# Altium PCB PCB_monitoring_ConnectA10.PcbDoc
Units mm, origin at the board's own origin, x right, y up, seen from the top; angles counter-clockwise.
Board outline 35 x 60 mm, 2 copper layers (Top Layer, Bottom Layer), stack 1.571 mm thick; 9 components, 232 nets, 190 pads, 3 vias.
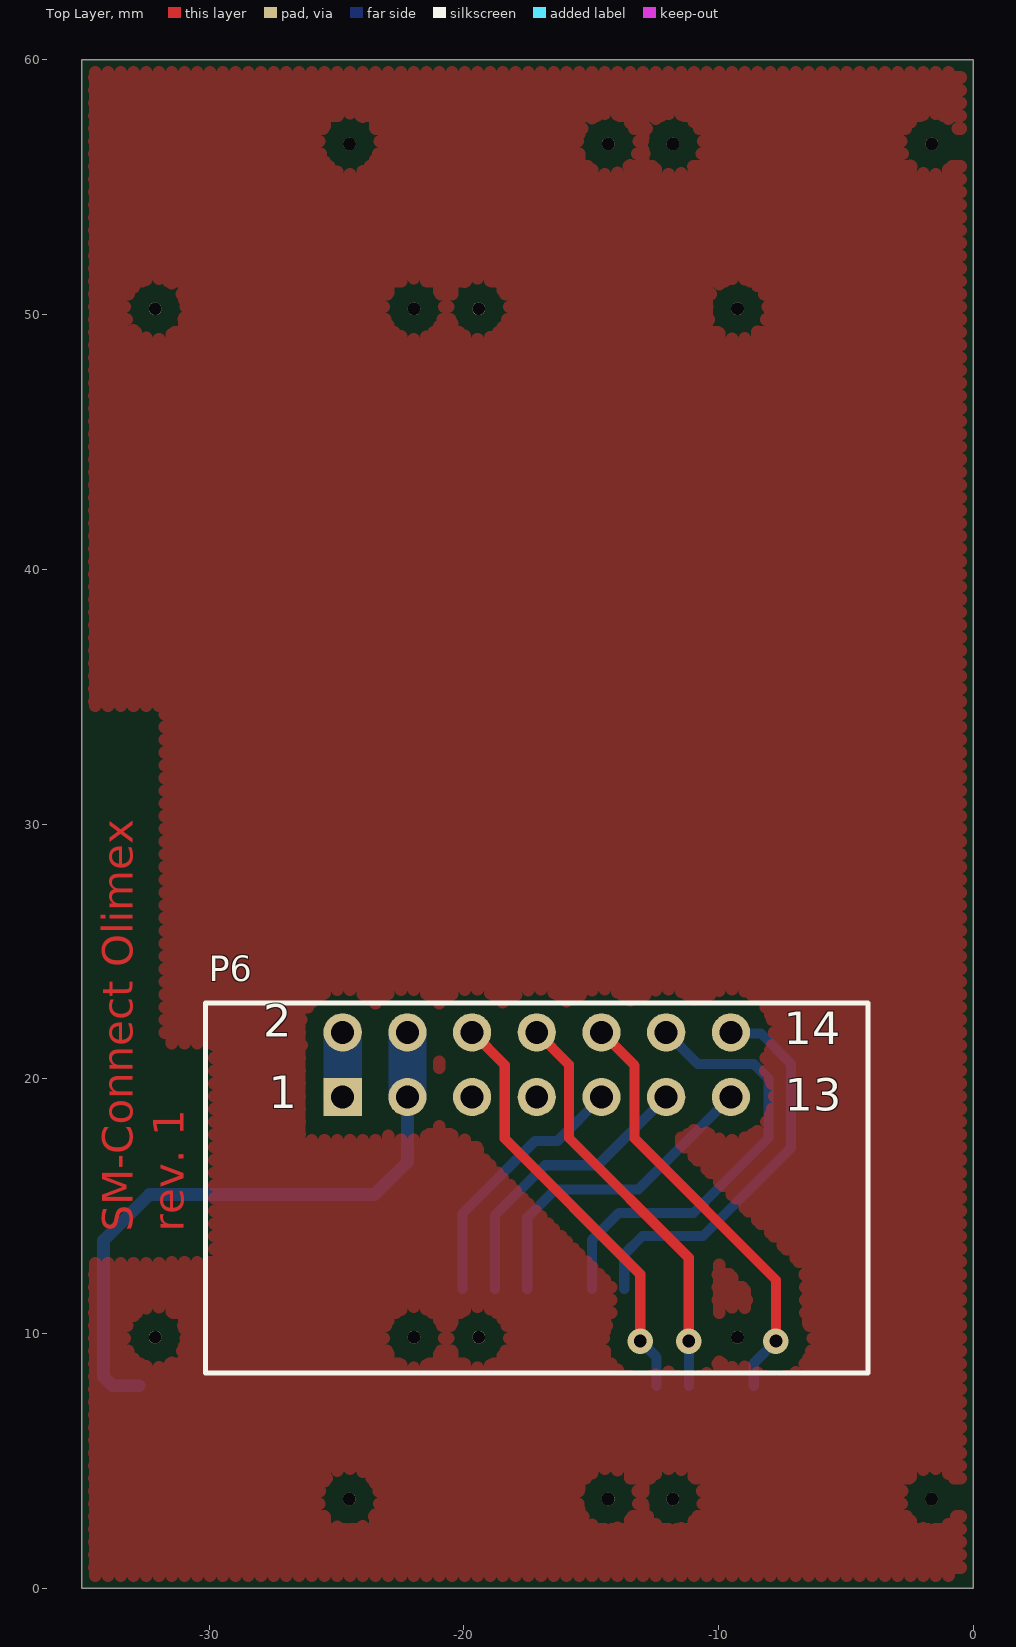
[diagram p0: Top Layer view]
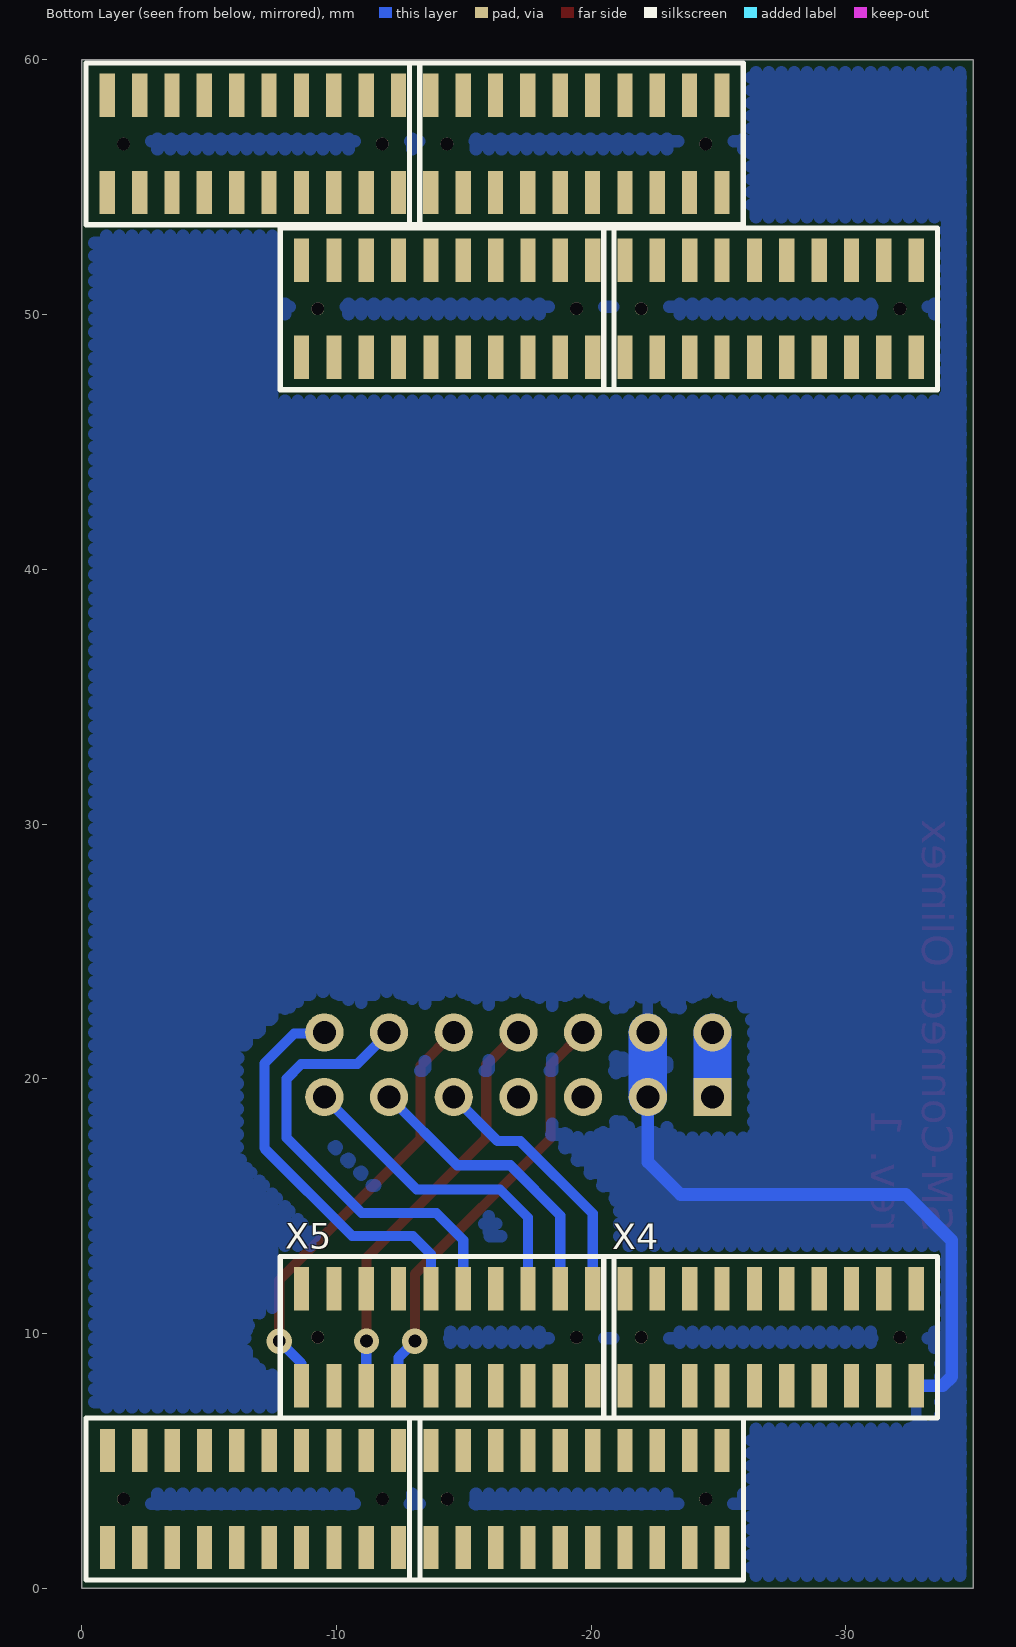
[diagram p1: Bottom Layer view, seen from below]
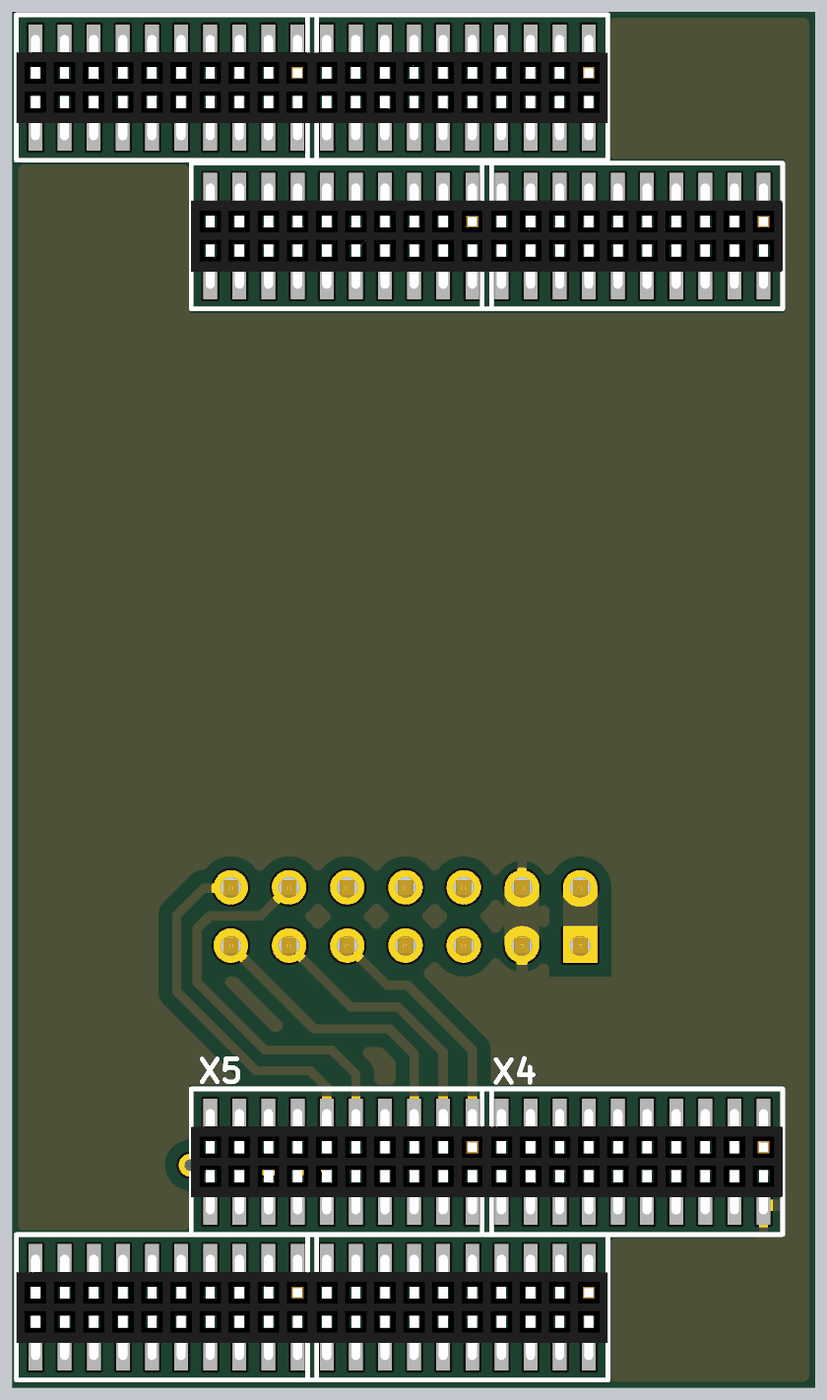
[diagram p2: 3D render of the assembled board from below, using the file's embedded part models]

## Layer stack, top to bottom
Top Solder: solder mask 0.0102, Solder Resist, Dk 3.5
Top Layer: signal copper 0.0356
Dielectric 1: dielectric 1.5, FR-4, Dk 4.8
Bottom Layer: signal copper 0.0356
Bottom Solder: solder mask 0.0102, Solder Resist, Dk 3.5

## Board outline
-35,0 0,0 0,60 -35,60

## Design rules (kind name [scope] priority, off if disabled: settings)
Clearance Clearance_3 [InPolygon And InNetClass('GND')] p1: gap=0.4
Clearance Clearance_2 [InPolygon And OnLayer('Bottom Layer')] p2: gap=0.6
Clearance Clearance_1 [InPolygon And OnLayer('Top Layer')] p3: gap=0.7
Clearance [All] p4: gap=0.25
ComponentClearance [All] p1: gap=0 collisioncheckmode=3 verticalgap=0 showdistances=FALSE
Height [All] p1: minheight=0 maxheight=30 prefheight=12.7
HoleSize [All] p1: absolutevalues=TRUE maxlimit=5 minlimit=0.2 maxpercent=80.000 minpercent=20.000
HoleToHoleClearance [All] p1: gap=0.25 allowstackedmicrovias=TRUE
MinimumSolderMaskSliver [All] p1: minsoldermaskwidth=0
PlaneClearance [All] p1: clearance=0.5
PlaneConnect [All] p1: planeconnectstyle=Relief reliefexpansion=0.5 reliefentries=4 reliefconductorwidth=0.3 reliefairgap=0.25
PolygonConnect [All] p1: connectstyle=Relief reliefconductorwidth=0.4 reliefentries=4 polygonreliefangle="90 Angle" airgapwidth=0.4
RoutingCorners [All] p1: cornerstyle=45-Degree minsetback=2 maxsetback=2
RoutingVias [All] p1: holewidth=0.8 width=1.3 viastyle="Through Hole" minholewidth=0.3 minwidth=0.8 maxholewidth=5 maxwidth=7
SilkToBoardRegionClearance [All] p1 off:
SilkToSilkClearance [All] p1: silktosilkclearance=0
SilkToSolderMaskClearance [IsPad] p1: minsilkscreentomaskgap=0 clearancetoexposedcopper=TRUE
SolderMaskExpansion [All] p1: expansion=0.1
Width [All] p1: maxlimit=4 minlimit=0.25 preferedwidth=0.5 minimp=50.000000 maximp=50.000000 favimp=50.000000
19 further rules are at their usual default settings.

## Classes and differential pairs
component class Sheet_ConnectA10: P6 X4 X5

## Components (designator, comment, footprint, x,y, rotation, side; value= is the part's Value field where it differs from the comment)
P6 "BH-14" BH-14R -17.14,20.55 r0 top
X4 "PBD2-20" PBD2-1.27-20-SMD -27.04,9.85 r0 bottom locked
X5 "PBD2-20" PBD2-1.27-20-SMD -14.34,9.85 r0 bottom locked
? "Comment" PBD2-1.27-20-SMD -19.415,56.7 r0 bottom
? "Comment" PBD2-1.27-20-SMD -6.715,56.7 r0 bottom
? "Comment" PBD2-1.27-20-SMD -27.04,50.225 r0 bottom
? "Comment" PBD2-1.27-20-SMD -14.34,50.225 r0 bottom
? "Comment" PBD2-1.27-20-SMD -19.42,3.5 r0 bottom
? "Comment" PBD2-1.27-20-SMD -6.72,3.5 r0 bottom

## Footprints (in the part's own frame and the unit in brackets; to place one, negate y for a bottom-side part, rotate by r counter-clockwise, add the part's x,y. Pads: shape width x height; smd on the part's side, far side on the other; paste and mask are expansions set on the pad)
BH-14R [mm] "Connector IDC"
  rect 1.5x1.5 hole 0.9: 1(-7.62,-1.27)
  round 1.5 hole 0.9: 2(-7.62,1.27) 3(-5.08,-1.27) 4(-5.08,1.27) 5(-2.54,-1.27) 6(-2.54,1.27) 7(0,-1.27) 8(0,1.27) 9(2.54,-1.27) 10(2.54,1.27) 11(5.08,-1.27) 12(5.08,1.27) 13(7.62,-1.27) 14(7.62,1.27)
  silkscreen extent -13,-12.1 13,2.42, body extent -13.01,-11.99 13.01,1.58, height 8.88
PBD2-1.27-20-SMD [mm] "Connector; Header; 20 Position"
  round 0.5 hole 0.5: 0(-5.08,0) 0(5.08,0)
  rect 0.6x1.7 smd: 1(-5.715,-1.905) 2(-5.715,1.905) 3(-4.445,-1.905) 4(-4.445,1.905) 5(-3.175,-1.905) 6(-3.175,1.905) 7(-1.905,-1.905) 8(-1.905,1.905) 9(-0.635,-1.905) 10(-0.635,1.905) 11(0.635,-1.905) 12(0.635,1.905) 13(1.905,-1.905) 14(1.905,1.905) 15(3.175,-1.905) 16(3.175,1.905) 17(4.445,-1.905) 18(4.445,1.905) 19(5.715,-1.905) 20(5.715,1.905)
  silkscreen extent -6.55,-3.17 6.55,3.17, body extent -6.55,-2.3 6.55,2.3, height 4.5

## Part data
P6: "IDC/BH"
X4 X5: "Header, 20-Pin"

## Via types
v1: diameter 1, hole 0.5, Top Layer to Bottom Layer, 3 vias

## Nets (pads, with @x,y where several pads share a name; then routed paths per layer and width w, separated by ;. In a path a pad name is that pad's centre, name@x,y a point inside that pad or via, vN(x,y) a via of type N, cw(c..) or ccw(c..) an arc to the next point about the centre after c; other vN are vias at no path point)
1-WIRE1: 
1-WIRE1_T: 
1-WIRE2: 
1-WIRE2_T: 
1-WIRE3: 
1-WIRE3_T: 
3.3V: 
3.3V_T: 
5V: 
5V_BUS: 
5V_CPU: 
5V_CPU_: P6.1 P6.2 | length 2.5
  Bottom Layer w1.5: P6.1 P6.2
5V_T: 
12V: 
12V_B: 
12V_EXT: 
12V_EXT_T: 
12V_IN1: 
12V_IN2: 
12V_INT: 
A: 
B: 
B_OPR1: 
B_OPR2: 
B_OPR3: 
B_OPR4: 
B_OSR1: 
B_OSR2: 
B_OSR3: 
B_OSR4: 
B_OSR5: 
B_OSR6: 
B_OSR7: 
B_OSR8: 
B_OSR9: 
B_OSR10: 
B_OSR11: 
B_OSR12: 
B_OSR13: 
B_OSR14: 
BUTTON: P6.13 X5.5 | length 12.7
  Bottom Layer w0.4: X5.5 -17.515,14.55 -16.415,15.65 -13.15,15.65 P6.13
C_OPR1: 
C_OPR2: 
C_OPR3: 
C_OPR4: 
C_OSR1: 
C_OSR2: 
C_OSR3: 
C_OSR4: 
C_OSR5: 
C_OSR6: 
C_OSR7: 
C_OSR8: 
C_OSR9: 
C_OSR10: 
C_OSR11: 
C_OSR12: 
C_OSR13: 
C_OSR14: 
DCI1: 
DCI2: 
DCI3: 
DCI4: 
DCI5: 
DCI6: 
DCI7: 
DCI8: 
DI1: 
DI2: 
DI3: 
DI4: 
DI5: 
DI6: 
DI7: 
DI8: 
FA: 
FB\: 
FY: 
FZ\: 
GND: 
GND_: P6.3 P6.4 X4.2 | length 25.2
  Bottom Layer w0.5: X4.2 -33.795,7.945 -34.15,8.3 -34.15,13.65 -32.35,15.45 -23.5,15.45 -22.22,16.73 P6.3
  Bottom Layer w1.5: P6.3 P6.4
GND_B: 
GND_BUS: 
GND_EXT: 
GND_EXT_T: 
GND_OD: 
GND_T: 
IN_A1: 
IN_A2: 
IN_ADC1: 
IN_ADC2: 
IN_D1: 
IN_D2: 
IN_D3: 
IN_D4: 
IN_D5: 
IN_D5_T: 
IN_D6: 
IN_D6_T: 
IN_D7: 
IN_D7_T: 
IN_D8: 
IN_D8_T: 
ISR1: 
ISR1_T: 
ISR2: 
ISR2_T: 
ISR3: 
ISR3_T: 
ISR4: 
ISR4_T: 
ISR5: 
ISR6: 
ISR7: 
ISR8: 
LED1: P6.9 X5.1 | length 10.3
  Bottom Layer w0.4: X5.1 -20.055,14.71 -17.215,17.55 -16.33,17.55 P6.9
LED2: P6.11 X5.3 | length 11.5
  Bottom Layer w0.4: X5.3 -18.785,14.63 -16.815,16.6 -14.74,16.6 P6.11
LED_OD: 
NetC2_2: 
NetC3_1: 
NetC6_2: 
NetC11_1: 
NetC12_2: 
NetC13_2: 
NetC16_1: 
NetC17_1: 
NetC18_1: 
NetC19_1: 
NetC22_1: 
NetC23_1: 
NetC24_1: 
NetC25_1: 
NetC26_1: 
NetC27_1: 
NetC28_2: 
NetC29_1: 
NetC30_2: 
NetC31_1: 
NetC32_1: 
NetC34_1: 
NetC36_1: 
NetC38_1: 
NetD4_2: 
NetDS1_2: 
NetDS2_1: 
NetDS2_2: 
NetDS3_1: 
NetDS3_2: 
NetK1_1: 
NetK1_7: 
NetK2_1: 
NetK2_7: 
NetK3_1: 
NetK3_7: 
NetK4_1: 
NetK4_7: 
NetK5_1: 
NetK5_7: 
NetK6_1: 
NetK6_7: 
NetK7_1: 
NetK7_7: 
NetK8_1: 
NetK8_7: 
NetK9_1: 
NetK9_7: 
NetK10_1: 
NetK10_7: 
NetK11_1: 
NetK11_7: 
NetK12_1: 
NetK12_7: 
NetK13_1: 
NetK13_7: 
NetK14_1: 
NetK14_7: 
NetK15_3: 
NetK15_4: 
NetK15_5: 
NetK16_3: 
NetK16_4: 
NetK16_5: 
NetK17_3: 
NetK17_4: 
NetK17_5: 
NetK18_3: 
NetK18_4: 
NetK18_5: 
NetP1_2: 
NetR3_2: 
NetR52_1: 
NetR53_1: 
NetR57_2: 
NetR58_2: 
NetR60_1: 
NetU5_2: 
NetU29_1: 
NetU29_4: 
NetU31_2: 
NetU31_3: 
NRST: 
OD: 
OPR1: 
OPR2: 
OPR3: 
OPR4: 
OSR1: 
OSR2: 
OSR3: 
OSR4: 
OSR5: 
OSR6: 
OSR7: 
OSR8: 
OSR9: 
OSR10: 
OSR11: 
OSR12: 
OSR13: 
OSR14: 
SWCLK: 
SWDIO: 
USART1_DE: 
USART1_DE_: P6.10 X5.20 | length 17.1
  Top Layer w0.4: P6.10 -13.3,20.52 -13.3,17.65 -7.75,12.1 v1(-7.75,9.7)
  Bottom Layer w0.4: X5.20 -8.625,8.825 v1(-7.75,9.7)
USART1_RX: 
USART1_RX_: P6.8 X5.16 | length 16.3
  Top Layer w0.4: P6.8 -15.875,20.555 -15.875,17.675 -11.175,12.975 v1(-11.175,9.7)
  Bottom Layer w0.3: v1(-11.175,9.7) v1@-11.165,9.69
  Bottom Layer w0.4: X5.16 v1@-11.165,9.69
USART1_TX: 
USART1_TX_: P6.6 X5.14 | length 16.9
  Top Layer w0.4: P6.6 -18.4,20.54 -18.4,17.65 -13.075,12.325 v1(-13.075,9.7)
  Bottom Layer w0.4: v1(-13.075,9.7) -12.435,9.06 X5.14
USART2_RX: 
USART2_RX_: P6.12 X5.9 | length 17.6
  Bottom Layer w0.4: X5.9 -14.975,13.665 -13.915,14.725 -10.99,14.725 -8.04,17.675 -8.04,20 -8.615,20.575 -10.815,20.575 P6.12
USART2_TX: 
USART2_TX_: P6.14 X5.11 | length 15.8
  Bottom Layer w0.4: X5.11 -13.705,13.11 -12.99,13.825 -10.615,13.825 -7.165,17.275 -7.165,20.6 -8.34,21.775 -9.475,21.775 P6.14
pads on no net: ?.0 ?.1 ?.2 ?.3 ?.4 ?.5 ?.6 ?.7 ?.8 ?.9 ?.10 ?.11 ?.12 ?.13 ?.14 ?.15 ?.16 ?.17 ?.18 ?.19 ?.20 P6.5 P6.7 X4.0 X4.1 X4.3 X4.4 X4.5 X4.6 X4.7 X4.8 X4.9 X4.10 X4.11 X4.12 X4.13 X4.14 X4.15 X4.16 X4.17 X4.18 X4.19 X4.20 X5.0 X5.2 X5.4 X5.6 X5.7 X5.8 X5.10 X5.12 X5.13 X5.15 X5.17 X5.18 X5.19

## Polygon pours and split planes (outlines as drawn)
GND_ on Bottom Layer "pol_gnd" (hatched 90Degree grid 0.5 track 0.5, pour order 4): -34.5,0.5 -34.5,59.5 -0.5,59.5 -0.5,0.5
no net on Top Layer "pol_gnd" (hatched 90Degree grid 0.5 track 0.5, pour order 3): -34.5,0.5 -34.5,59.5 -0.5,59.5 -0.5,0.5

## Other copper
Top Layer:
  text "SM-Connect Olimex" at -33,14 h1.2 r90
  text "rev. 1" at -31,14 h1.2 r90

## Silkscreen, mask and mechanical layers (free items; w line width, h text height)
Mechanical 3:
  the board outline again, w0.2

## Text inside footprints (layer, text, board x,y; h text height)
P6: Top Overlay "14" at -7.435,21.35 h1.27; Top Overlay "13" at -7.41,18.75 h1.27; Top Overlay "2" at -27.87,21.65 h1.27; Top Overlay "1" at -27.67,18.85 h1.27